# Altium PCB Mixed Signal Board Project.PcbDoc (part 3 of 3)
Units mm, origin at the board's own origin, x right, y up, seen from the top; angles counter-clockwise.
Board outline 70.1 x 70.99 mm, 4 copper layers (Top Layer, GND, VCC, Bottom Layer), stack 1.565 mm thick; 188 components, 143 nets, 738 pads, 465 vias.
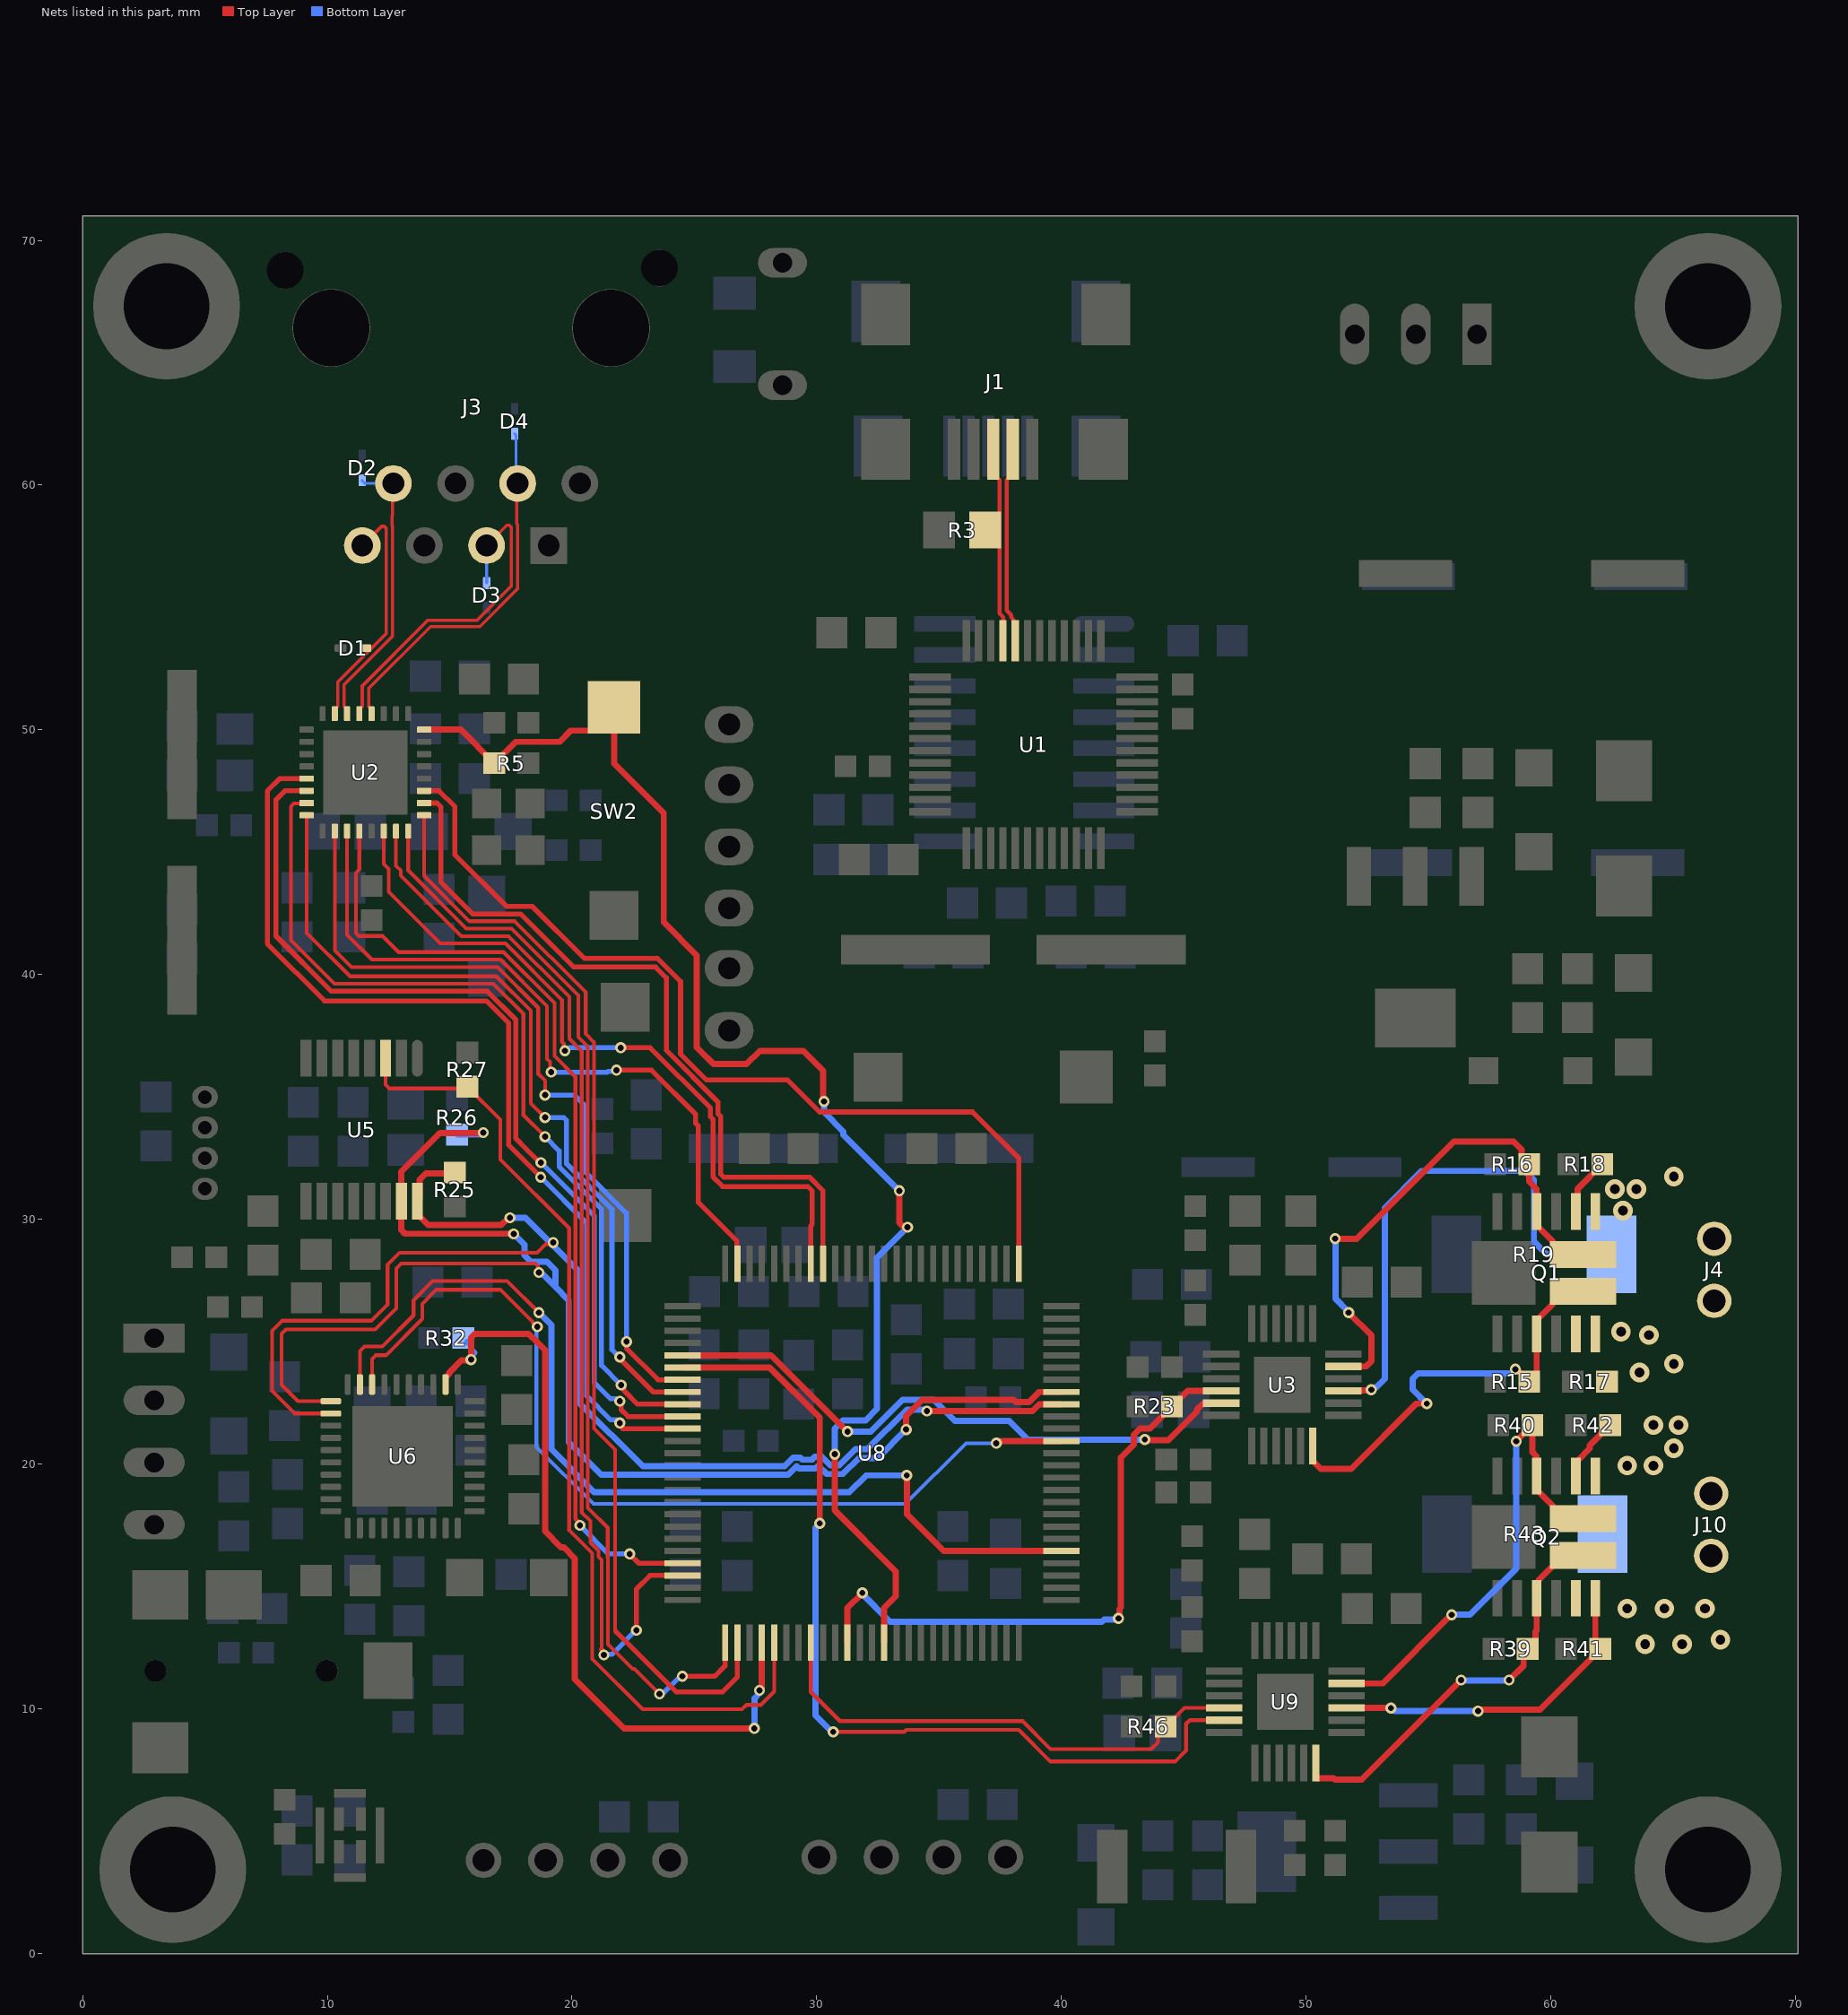
[diagram p5: the nets of this part, all layers, seen from the top]

## Via types
v1: diameter 0.8, hole 0.4, Top Layer to Bottom Layer, tented both sides, 287 vias
v2: diameter 0.45, hole 0.25, Top Layer to Bottom Layer, tented both sides, 178 vias

## Nets (pads, with @x,y where several pads share a name; then routed paths per layer and width w, separated by ;. In a path a pad name is that pad's centre, name@x,y a point inside that pad or via, vN(x,y) a via of type N, cw(c..) or ccw(c..) an arc to the next point about the centre after c; other vN are vias at no path point) (continued)
PHY_RESET: R5.1 SW2.2 U2.32 U8.64 | length 58.4
  Top Layer w0.254: U2.32@13.957,50.01 15.452,50.01 R5.1@16.821,48.641 17.69,49.51 19.487,49.51 19.947,49.97 20.769,49.97 SW2.2@21.717,50.918 21.717,48.616 23.749,46.584 23.749,42.139 25.1,40.788 25.1,37.022 25.248,36.873 25.781,36.341 27.133,36.341 27.675,36.882 29.448,36.882 30.258,36.072 v2@30.258,34.8 ; v2(30.734,20.404) 30.734,18.11 33.227,15.617 33.227,14.599 32.758,14.13 U8.64@32.758,12.709 ; v2(33.376,31.168) 33.376,29.87 v2@33.655,29.591
  Bottom Layer w0.254: v2(30.296,34.815) 30.296,34.382 31.09,33.588 31.09,33.454 v2(33.376,31.168) ; v2(30.734,20.404) 30.734,21.447 31.071,21.784 31.994,21.784 32.461,22.252 32.461,28.43 v2(33.709,29.679)
RD_N: D4.K J3.6 U2.4 | length 15.3
  Top Layer w0.132: U2.4@11.807,50.66 11.807,50.835 11.686,50.956 11.686,51.687 14.224,54.224 16.236,54.224 17.78,55.768 17.78,58.387 17.74,58.427 17.74,60.031 J3.6@17.78,60.071
  Bottom Layer w0.114: D4.K@17.653,62.103 17.716,62.039 17.716,60.134 J3.6@17.78,60.071
RD_P: D3.K J3.5 U2.5 | length 14.3
  Top Layer w0.132: U2.5@11.307,50.66 11.307,50.835 11.428,50.956 11.428,51.794 14.117,54.483 16.129,54.483 17.521,55.875 17.521,58.279 17.444,58.357 17.336,58.357 J3.5@16.51,57.531
  Bottom Layer w0.114: D3.K@16.51,56.001 J3.5@16.51,57.531
RESET: R27.1 U5.3 U8.55 | length 40.6
  Top Layer w0.152: U5.3@12.379,36.584 12.379,35.5 12.528,35.351 15.653,35.351 R27.1@15.723,35.42 17.071,34.072 17.071,32.447 19.885,29.633 19.885,17.297 20.826,16.356 20.826,12.04 22.887,9.979 26.946,9.979 27.125,10.158 27.709,10.158 28.258,10.707 U8.55@28.258,12.709
RESET_DAC: R32.1 U6.32 U8.54 | length 32.3
  Top Layer w0.254: U6.32@14.833,23.548 14.977,23.692 14.977,23.735 15.475,24.232 15.838,24.232 v2(15.875,24.27) 15.875,25.175 16.024,25.324 18.229,25.324 18.395,25.158 18.401,25.158 18.894,24.665 18.894,21.585 18.898,21.582 18.898,17.253 19.55,16.601 19.664,16.601 20.118,16.146 20.118,11.205 22.121,9.202 v2(27.45,9.202) ; v2(27.66,10.75) 27.758,10.848 U8.54@27.758,12.709
  Bottom Layer w0.254: R32.1@15.72,24.991 15.875,24.836 15.875,24.68 16.003,24.551 15.875,24.423 v2(15.875,24.27) ; v2(27.45,9.202) 27.45,10.432 27.66,10.642 v2(27.66,10.75)
RX_CLK: U2.19 U8.24 | length 29.9
  Top Layer w0.152: U2.19@10.807,45.86 10.807,41.629 11.822,40.614 17.081,40.614 18.922,38.772 18.922,38.77 18.979,38.714 18.979,36.553 19.099,36.433 19.099,36.064 v2(19.146,36.017)
  Top Layer w0.203: v2(21.812,36.097) 23.25,36.097 25.05,34.298 25.05,33.935 25.155,33.83 25.155,30.704 26.733,29.126 26.733,28.21 U8.24@26.758,28.185
  Bottom Layer w0.203: v2(19.146,36.017) 21.447,36.017 21.483,36.053 21.768,36.053 v2(21.812,36.097)
RX_D0: U2.16 U8.33 | length 34.7
  Top Layer w0.152: U2.16@9.157,46.51 9.157,41.703 10.931,39.929 16.908,39.929 18.316,38.521 18.316,35.813 18.318,35.812 18.318,34.743 v2@18.967,34.094
  Top Layer w0.203: v2(21.952,24.373) 21.952,24.318 23.323,22.947 U8.33@24.52,22.947
  Bottom Layer w0.203: v2(18.898,34.163) 19.658,34.163 19.777,34.044 19.777,32.271 21.632,30.416 21.632,24.674 21.933,24.373 v2(21.952,24.373)
RX_D1: U2.15 U8.34 | length 36.6
  Top Layer w0.152: U2.15@9.157,47.01 9.137,46.99 8.628,46.99 8.509,46.871 8.509,41.402 10.287,39.624 16.784,39.624 18.013,38.395 18.013,34.259 v2(18.898,33.374)
  Top Layer w0.203: v2(22.005,23.233) 22.117,23.121 22.117,23.013 22.684,22.447 U8.34@24.52,22.447
  Bottom Layer w0.203: v2(18.898,33.374) 19.472,32.8 19.472,32.145 21.206,30.411 21.206,24.032 v2(22.005,23.233)
RX_D2: U2.14 U8.35 | length 38.7
  Top Layer w0.203: U2.14@9.157,47.51 8.267,47.51 7.901,47.144 7.901,41.579 10.161,39.319 16.539,39.319 17.706,38.152 17.706,33.297 18.11,32.893 18.683,32.32 v2(18.73,32.32) ; v2(21.952,22.573) 21.999,22.526 21.999,22.276 22.003,22.273 22.003,22.233 22.288,21.947 U8.35@24.52,21.947
  Bottom Layer w0.203: v2(18.73,32.32) 20.901,30.149 20.901,23.334 21.561,22.674 21.815,22.674 21.916,22.573 v2(21.952,22.573)
RX_D3: U2.13 U8.36 | length 40.4
  Top Layer w0.203: U2.13@9.157,48.01 8.06,48.01 7.548,47.498 7.548,41.263 9.884,38.927 16.5,38.927 17.402,38.026 17.402,33.043 v2(18.72,31.725) ; v2(21.952,21.678) 21.952,21.611 22.071,21.492 22.071,21.447 U8.36@24.52,21.447
  Bottom Layer w0.203: v2(18.72,31.725) 20.596,29.848 20.596,23.208 20.599,23.205 20.599,22.784 21.577,21.806 21.822,21.806 v2@21.951,21.678
RX_DV: U2.18 U8.32 | length 33.1
  Top Layer w0.152: U2.18@10.307,45.86 10.307,40.984 10.982,40.309 16.957,40.309 18.619,38.647 18.619,35.941 18.898,35.663 v2(18.898,35.079)
  Top Layer w0.203: v2(22.225,25.003) 22.225,24.734 23.512,23.447 U8.32@24.52,23.447
  Bottom Layer w0.203: v2(18.898,35.079) 20.089,35.079 20.549,34.62 20.549,31.931 22.225,30.254 v2(22.225,25.003)
RX_ER: U2.20 U8.47 | length 40.1
  Top Layer w0.152: U2.20@11.307,45.86 11.307,44.297 11.165,44.155 11.165,41.699 11.285,41.58 12.251,41.58 12.913,40.919 17.205,40.919 19.283,38.84 19.283,36.679 20.139,35.824 20.139,17.763 20.323,17.579 v2(20.323,17.499)
  Top Layer w0.203: v2(22.353,16.329) 22.735,15.947 U8.47@24.52,15.947
  Bottom Layer w0.203: v2(20.323,17.499) 21.492,16.329 v2(22.353,16.329)
SCL: R25.1 U5.16 U6.2 U8.92 | length 57.7
  Top Layer w0.152: U6.2@10.146,22.07 8.664,22.07 7.747,22.987 7.747,25.449 8.16,25.862 11.805,25.862 12.46,26.517 12.46,28.135 12.954,28.629 18.577,28.629 18.943,28.995 19.171,28.995 v2(19.228,29.052)
  Top Layer w0.254: R25.1@15.304,31.877 14.033,31.877 13.777,31.621 13.777,30.832 U5.16@13.679,30.734 13.679,30.209 14.119,29.769 17.114,29.769 17.394,30.048 v2@17.424,30.048 ; v2(34.503,22.171) 38.817,22.171 39.093,22.447 U8.92@39.996,22.447
  Bottom Layer w0.254: v2(17.462,30.064) 18.096,30.064 v2@19.183,28.977 ; v2(19.228,29.052) 19.228,29.022 v2@19.183,28.977 ; v2(34.503,22.171) 34.449,22.225 33.68,22.225 32.06,20.605 31.576,20.605 30.922,19.95 30.546,19.95 30.203,20.294 29.908,20.294 29.795,20.181 29.419,20.181 29.333,20.267 29.039,20.267 28.69,19.918 22.89,19.918 20.266,22.542 20.266,27.894 v2@19.183,28.977
SCLK: U6.38 U8.89 | length 38.4
  Top Layer w0.152: U6.38@11.831,23.255 11.831,24.297 11.98,24.446 12.391,24.446 13.878,25.933 13.878,26.551 14.453,27.125 17.071,27.125 18.388,25.809 18.388,25.777 18.553,25.612 v2(18.583,25.612)
  Top Layer w0.254: v2(37.338,20.853) 37.391,20.853 37.485,20.947 U8.89@39.996,20.947
  Bottom Layer w0.152: v2(18.583,25.612) 18.543,25.572 18.543,20.709 20.881,18.372 33.618,18.372 36.1,20.853 v2(37.338,20.853)
SDA: R26.1 U5.15 U6.1 U8.93 | length 63
  Top Layer w0.152: U6.1@10.146,22.57 8.799,22.57 8.128,23.241 8.128,25.329 8.306,25.508 11.951,25.508 12.814,26.371 12.814,27.988 13.021,28.195 18.499,28.195 18.606,28.089 18.606,27.869 v2(18.644,27.832)
  Top Layer w0.254: v2@16.332,33.528 14.605,33.528 13.029,31.952 U5.15@13.029,30.734 13.029,29.562 13.178,29.413 17.604,29.413 v2(17.614,29.403) ; v2(33.655,21.412) 33.655,21.965 34.315,22.625 38.049,22.625 38.139,22.535 38.679,22.535 39.091,22.947 U8.93@39.996,22.947
  Bottom Layer w0.254: R26.1@15.304,33.465 16.238,33.465 16.317,33.543 v2(16.37,33.543) ; v2(17.614,29.403) 18.054,28.963 18.054,28.524 18.308,28.27 18.974,28.27 19.322,27.922 19.322,27.24 ; v2(18.644,27.832) 18.73,27.832 19.322,27.24 ; v2(33.655,21.412) 32.492,20.249 31.723,20.249 31.069,19.595 30.399,19.595 30.056,19.938 29.942,19.825 29.272,19.825 29.186,19.911 28.837,19.563 21.198,19.563 19.863,20.898 19.863,26.698 19.322,27.24
SDIN: U6.39 U8.80 | length 40.6
  Top Layer w0.152: U6.39@11.331,23.255 11.331,24.616 11.515,24.8 12.245,24.8 13.524,26.079 13.524,26.697 14.306,27.479 17.348,27.479 18.635,26.192 v2(18.644,26.192)
  Top Layer w0.254: v2(33.68,19.538) 33.68,17.958 35.191,16.447 U8.80@39.996,16.447
  Bottom Layer w0.254: v2(18.644,26.192) 19.152,25.684 19.152,20.604 20.904,18.851 31.332,18.851 32.018,19.538 v2(33.68,19.538)
SH1: J4.1 Q1.3 Q1.13 R15.2 U3.18 | length 17.8
  Top Layer w0.254: U3.18@50.272,20.737 50.272,20.137 50.597,19.812 51.848,19.812 54.506,22.47 v2(54.927,22.47) ; v2(58.547,23.876) 58.585,23.838 58.648,23.838 58.969,23.517 59.268,23.517 59.417,23.666 Q1.3@59.417,25.313 59.417,25.863 60.094,26.54 60.094,26.64 60.517,27.063 Q1.13@61.317,27.063
  Bottom Layer w0.254: v2(54.927,22.47) 54.356,23.041 54.356,23.484 54.572,23.7 58.371,23.7 v2(58.547,23.876)
SH1_2: J10.1 Q2.3 Q2.13 R39.2 U9.18 | length 17
  Top Layer w0.254: U9.18@50.399,7.783 50.399,7.183 50.422,7.16 51.133,7.16 51.181,7.112 52.269,7.112 54.336,9.179 v2(56.335,11.178) ; v2(58.293,11.176) 58.886,11.769 58.886,12.277 59.372,12.763 59.372,13.163 59.417,13.208 Q2.3@59.417,14.518 59.417,14.843 59.49,14.916 59.49,15.241 60.517,16.268 Q2.13@61.317,16.268
  Bottom Layer w0.254: v2(56.335,11.178) 56.386,11.178 56.414,11.15 58.267,11.15 v2(58.293,11.176)
SH2: J4.2 Q1.10 Q1.14 R16.1 U3.23 | length 22
  Top Layer w0.254: v2(51.181,29.21) 52.07,29.21 56.032,33.172 58.477,33.172 58.801,32.848 58.801,32.575 R16.1@59.118,32.258 59.118,31.541 59.417,31.242 Q1.10@59.417,30.313 59.417,29.763 60.094,29.086 60.094,28.986 60.517,28.563 Q1.14@61.317,28.563 ; U3.23@51.522,23.991 52.451,23.991 52.662,24.202 52.662,25.263 v2(51.737,26.187)
  Bottom Layer w0.254: v2(51.181,29.21) 51.199,29.192 51.199,26.757 51.737,26.218 v2(51.737,26.187)
SH2_2: J10.2 Q2.10 Q2.14 R40.1 U9.23 | length 20.2
  Top Layer w0.254: U9.23@51.649,11.037 53.118,11.037 55.924,13.843 v2(55.944,13.843) ; v2(58.585,20.933) 58.589,20.933 R40.1@59.245,21.59 59.245,20.492 59.417,20.32 Q2.10@59.417,19.518 59.417,18.968 60.094,18.291 60.094,18.191 60.517,17.768 Q2.14@61.317,17.768
  Bottom Layer w0.254: v2(55.944,13.843) 56.699,13.843 58.585,15.728 58.585,20.79 58.547,20.828 58.585,20.866 v2(58.585,20.933)
SNSOUT: R23.1 U3.10 U8.61 | length 25.4
  Top Layer w0.254: U8.61@31.258,12.709 31.258,14.13 v2(31.865,14.738) ; v2(42.329,13.692) 42.367,13.729 42.367,14.077 42.427,14.138 42.427,20.266 42.951,20.789 42.951,21.189 43.216,21.455 43.617,21.455 R23.1@44.513,22.352 45.152,22.991 U3.10@46.522,22.991
  Bottom Layer w0.254: v2@31.828,14.722 32.987,13.564 41.664,13.564 41.755,13.654 42.292,13.654 v2(42.329,13.692)
SNSOUT_2: R46.1 U8.58 U9.10 | length 20.8
  Top Layer w0.152: U8.58@29.758,12.709 29.758,10.689 30.947,9.5 38.41,9.5 39.553,8.357 43.663,8.357 43.942,8.636 43.942,8.954 R46.1@44.259,9.271 45.025,10.037 U9.10@46.649,10.037
SO: U3.11 U8.30 | length 25.2
  Top Layer w0.254: U8.30@24.52,24.447 28.143,24.447 v2@31.258,21.332 ; v2(43.404,21.002) 43.436,20.97 44.367,20.97 45.543,22.147 45.543,22.236 45.776,22.468 46.499,22.468 U3.11@46.522,22.491
  Bottom Layer w0.254: v2(31.259,21.331) 31.26,21.332 32.209,21.332 33.502,22.625 34.785,22.625 35.642,21.768 37.871,21.768 38.638,21.002 v2(43.404,21.002)
SO_2: U8.31 U9.11 | length 37.6
  Top Layer w0.152: v2(30.67,9.058) 33.572,9.058 33.66,9.146 38.258,9.146 39.555,7.849 44.638,7.849 45.093,8.303 45.093,9.388 45.241,9.537 U9.11@46.649,9.537
  Top Layer w0.254: U8.31@24.52,23.947 28.072,23.947 30.124,21.895 v2(30.124,17.577)
  Bottom Layer w0.254: v2(30.124,17.577) 29.945,17.398 29.945,9.73 v2@30.632,9.042
SP: Q1.5 Q1.6 Q1.7 Q1.8 R17.2 R18.2 R19.2 U3.21 | length 24.1
  Top Layer w0.254: U3.21@51.522,22.991 51.545,23.014 52.638,23.014 v2(52.662,23.037) ; Q1.8@61.017,30.313 61.09,30.386 61.09,31.245 R18.2@62.103,32.258
  Bottom Layer w0.254: v2(52.662,23.037) 52.713,23.037 52.813,23.137 52.87,23.137 53.213,23.48 53.213,30.475 54.717,31.979 58.927,31.979 59.309,31.596 59.309,29.083 59.817,28.575 R19.2@62.484,28.575
  other v1: 63.627,23.749 65.025,24.098 64.008,25.273 62.865,25.412 62.941,30.353 62.611,31.242 63.5,31.242 65.024,31.75
SP_2: Q2.5 Q2.6 Q2.7 Q2.8 R41.2 R42.2 R43.2 U9.21 | length 16.3
  Top Layer w0.254: U9.21@51.649,10.037 51.651,10.035 53.465,10.035 v2(53.467,10.033) ; v2(57.023,9.906) 57.079,9.962 59.552,9.962 62.016,12.426 R41.2@62.016,12.446 61.817,12.645 Q2.6@61.817,14.518 ; Q2.8@61.017,19.518 61.09,19.591 61.09,20.141 61.597,20.648 61.597,20.766 R42.2@62.421,21.59
  Bottom Layer w0.254: v2(53.467,10.033) 53.594,9.906 v2(57.023,9.906)
  other v1: 63.85,12.645 65.362,12.645 66.929,12.827 63.119,14.097 64.64,14.097 66.294,14.097 63.119,19.939 64.194,19.939 65.025,20.648 64.194,21.593 65.215,21.593
TD_N: D2.K J3.2 U2.6 | length 12
  Top Layer w0.132: U2.6@10.807,50.66 10.807,50.835 10.686,50.956 10.686,51.85 12.66,53.823 12.66,58.346 12.639,58.368 12.639,58.74 12.66,58.761 12.66,60.031 J3.2@12.7,60.071
  Bottom Layer w0.114: D2.K@11.43,60.201 11.43,60.164 11.523,60.071 12.446,60.071 12.7,59.817 J3.2@12.7,60.071
TD_P: D1.K J3.1 U2.7 | length 9.8
  Top Layer w0.132: U2.7@10.307,50.66 10.307,50.835 10.428,50.956 10.428,51.957 12.401,53.93 12.401,58.239 12.324,58.316 12.215,58.316 J3.1@11.43,57.531
TX_CLK: U2.22 U8.18 | length 30.8
  Top Layer w0.152: U2.22@12.307,45.86 12.307,44.52 12.504,44.323 12.504,43.376 14.609,41.271 17.281,41.271 19.587,38.965 19.587,37.256 19.663,37.179 19.663,36.937 v2(19.71,36.889)
  Top Layer w0.203: v2(21.986,37.013) 23.196,37.013 25.659,34.55 25.659,34.188 25.764,34.083 25.764,31.731 26.15,31.345 29.639,31.345 29.813,31.171 29.813,29.79 29.758,29.734 U8.18@29.758,28.185
  Bottom Layer w0.203: v2(19.71,36.889) 19.777,36.889 19.901,37.013 v2(21.986,37.013)
TX_D0: U2.24 U8.51 | length 44.7
  Top Layer w0.152: U2.24@13.307,45.86 13.307,44.253 15.683,41.877 17.533,41.877 20.257,39.153 20.257,37.447 20.647,37.058 20.647,18.211 21.457,17.402 21.457,16.262 21.458,16.261 21.458,16.189 21.461,16.186 21.461,12.647 21.511,12.598 22.481,11.628 22.554,11.628 v2(23.571,10.61)
  Top Layer w0.203: v2(24.511,11.328) 25.826,11.328 26.258,11.76 U8.51@26.258,12.709
  Bottom Layer w0.203: v2(23.571,10.61) 23.595,10.634 23.715,10.634 24.409,11.328 v2(24.511,11.328)
TX_D1: U2.25 U8.52 | length 45.3
  Top Layer w0.152: U2.25@13.957,46.51 13.957,44.034 15.811,42.18 17.66,42.18 20.562,39.279 20.562,37.574 20.901,37.235 20.901,21.449 21.761,20.588 21.761,13.189 21.814,13.137
  Top Layer w0.203: 21.814,13.137 24.255,10.695 26.152,10.695 26.758,11.301 U8.52@26.758,12.709
TX_D2: U2.26 U8.17 | length 31
  Top Layer w0.203: U2.26@13.957,47.01 14.486,47.01 14.646,46.85 14.646,43.774 15.936,42.484 17.895,42.484 20.067,40.312 23.411,40.312 23.851,39.872 23.851,36.909 25.964,34.795 25.964,34.314 26.069,34.209 26.069,31.857 26.201,31.725 29.702,31.725 30.258,31.168 U8.17@30.258,28.185
TX_D3: U2.27 U8.1 | length 37.7
  Top Layer w0.203: U2.27@13.957,47.51 14.562,47.51 15.215,46.857 15.215,44.893 17.319,42.788 18.376,42.788 20.497,40.667 23.487,40.667 24.435,39.719 24.435,36.756 25.485,35.706 28.8,35.706 30.118,34.387 36.369,34.387 38.258,32.499 U8.1@38.258,28.185
TX_EN: U2.23 U8.48 | length 43.9
  Top Layer w0.152: U2.23@12.807,45.86 12.807,44.451 13.002,44.256 13.002,44.049 15.478,41.574 17.407,41.574 19.891,39.089 19.891,37.382 20.393,36.88 20.393,18.034 20.751,17.676 20.751,16.791 21.08,16.461 21.08,16.208 21.207,16.081 21.207,12.425
  Top Layer w0.203: 21.207,12.425 21.255,12.378 21.255,12.25 v2(21.302,12.203) ; v2(22.631,13.208) 22.631,14.893 23.185,15.447 U8.48@24.52,15.447
  Bottom Layer w0.203: v2(21.302,12.203) 21.326,12.227 21.625,12.227 22.606,13.208 v2(22.631,13.208)
USBD_N: J1.2 U1.32 | length 8.2
  Top Layer w0.166: J1.2@38.011,61.468 37.854,61.468 37.854,60.311 37.757,60.214 37.757,54.879 37.945,54.691 37.945,54.598 38.045,54.498 38.045,53.708 U1.32@38.112,53.641
USBD_P: J1.3 R3.1 U1.33 | length 8.7
  Top Layer w0.166: R3.1@36.891,58.801 R3.1@37.465,58.801 ; J1.3@37.211,61.468 37.368,61.468 37.368,60.311 37.465,60.214 R3.1@37.465,58.801 ; U1.33@37.612,53.641 37.611,53.642 37.611,54.611 37.465,54.757 37.465,57.658 R3.1@37.465,58.801
pads on no net: J1.1 J1.4 J3. J3.3 J3.4 J3.7 J3.8 J5.1 J5.4 J7. J7.4 J12. MH2.1 MH3.1 U1.2 U1.3 U1.4 U1.10 U1.11 U1.12 U1.13 U1.14 U1.15 U1.16 U1.17 U1.19 U1.21 U1.22 U1.28 U1.29 U1.30 U1.31 U1.41 U1.42 U1.43 U1.45 U1.46 U2.30 U2.31 U4.7 U4.8 U4.9 U4.10 U4.11 U4.12 U4.13 U4.15 U5.6 U5.7 U5.8 U5.9 U6.20 U6.21 U6.22 U6.23 U6.24 U6.25 U6.26 U6.29 U6.30 U6.36 U8.2 U8.3 U8.4 U8.5 U8.7 U8.8 U8.9 U8.15 U8.38 U8.39 U8.40 U8.41 U8.42 U8.43 U8.44 U8.46 U8.67 U8.77 U8.81 U8.82 U8.83 U8.84 U8.85 U8.86 U8.87 U8.88 U8.91 U8.95 U8.96 U8.97 U8.98

## Polygon pours and split planes (outlines as drawn)
GND on Bottom Layer "GND_L04_P003" (solid, pour order 3): 15.315,53.848 19.431,53.848 19.431,45.085 15.24,45.085
GND on Bottom Layer "GND_L04_P009" (solid, remove dead copper, pour order 9): 29.845,47.371 29.972,47.498 32.258,47.498 32.766,46.99 32.766,41.783 29.845,41.783
GND on Bottom Layer "GND_L04_P065" (solid, pour order 65): 37.084,27.305 36.512,26.733 36.512,25.892 35.893,25.273 33.02,25.273 32.927,25.18 32.927,22.876 35.813,22.876 35.813,22.755 35.83,22.738 35.83,22.171 37.338,22.171 38.608,23.441 38.608,27.344
GND on Bottom Layer "GND_L04_P064" (solid, pour order 64): 24.511,23.647 24.663,23.495 31.699,23.495 32.131,23.063 32.131,22.447 31.131,21.447 29.146,21.447 28.778,21.079 28.778,20.404 25.4,20.404 24.511,21.293
EARTH on Bottom Layer "Bottom Layer-EARTH" (solid, remove dead copper, pour order 68): 0,62.255 3.683,62.23 8.687,62.23 15.189,68.732 25.705,68.732 25.705,67.259 25.806,67.158 29.845,67.158 30.15,67.462 30.15,68.732 31.979,68.732 32.004,68.707 61.443,68.707 61.976,68.174 61.976,64.922 63.83,63.068 70.079,63.068 70.129,63.119 70.129,70.968 70.104,70.993 0,70.993
GND on Bottom Layer "GND_L04_P063" (solid, pour order 63): 61.874,6.071 62.103,6.299 62.103,8.001 61.671,8.433 52.934,8.433 52.934,8.407 52.349,7.823 52.349,6.096 52.913,5.532 54.674,5.532 55.11,5.969 56.642,5.969
+3V3 on Bottom Layer "+3V3_L04_P060" (solid, remove dead copper, pour order 60): 7.976,5.055 8.026,5.055 8.585,4.496 13.919,4.496 13.919,7.341 13.868,7.29 7.976,7.29
GND on Bottom Layer "GND_L04_P062" (solid, remove dead copper, pour order 62): 11.657,4.496 8.026,4.496 8.001,4.47 8.001,2.362 8.255,2.108 11.532,2.108 11.657,2.234
GND on Bottom Layer "GND_L04_P061" (solid, pour order 61): 12.192,35.331 12.319,35.204 12.319,33.782 12.287,33.75 8.579,33.75 8.357,33.972 8.357,35.56 11.899,35.56
NetC58_1 on Bottom Layer "NETC58_1_L04_P056" (solid, pour order 56): 24.765,33.528 31.496,33.528 31.496,32.131 24.765,32.131
NetC67_2 on Bottom Layer "NETC67_2_L04_P055" (solid, remove dead copper, pour order 55): 28.067,24.384 28.067,26.289 30.226,26.289 30.48,26.035 30.48,24.511 30.734,24.257 32.131,24.257 32.131,26.162 30.353,27.94 29.718,27.94 29.464,28.194 28.448,28.194 28.448,28.321 28.575,28.448 28.575,30.607 28.448,30.607 28.321,30.734 26.606,30.734 26.606,24.384
+1V8 on Bottom Layer "+1V8_L04_P051" (solid, pour order 51): 55.626,5.096 54.753,5.969 47.244,5.969 47.117,5.842 47.117,3.556 38.735,3.556 38.735,0.508 40.894,0.508 47.371,0.508 50.292,3.429 55.626,3.429
NetC90_2 on Bottom Layer "NETC90_2_L04_P049" (solid, pour order 49): 52.832,2.667 52.959,2.54 55.626,2.54 55.88,2.794 55.88,5.715 56.007,5.842 60.706,5.842 60.706,5.715 62.103,4.318 62.103,2.921 60.325,1.143 52.705,1.143
GND on Bottom Layer "GND_L04_P047" (solid, pour order 47): 56.769,15.728 56.769,19.177 57.277,19.685 57.277,21.844 57.15,21.844 56.832,22.162 55.547,22.162 53.086,19.7 53.086,15.748
GND on Bottom Layer "GND_L04_P046" (solid, pour order 46): 57.15,27.051 57.277,27.178 57.277,31.242 54.927,31.242 53.909,30.224 53.909,26.889 53.944,26.924 57.15,26.924
GND on Bottom Layer "GND_L04_P045" (solid, pour order 45): 47.879,32.516 44.45,32.516 43.053,31.119 43.053,30.226 43.18,30.099 46.403,30.099 46.522,30.218 46.522,31.369 47.879,31.369
+12V on Bottom Layer "+12V_L04_P043" (solid, pour order 43): 53.975,32.848 53.893,32.766 49.022,32.766 48.772,32.516 48.772,29.786 48.967,29.591 50.546,29.591 50.8,29.845 50.8,31.242 50.927,31.242 51.181,31.496 53.975,31.496
SP_2 on Bottom Layer "SP_2_L04_P040" (solid, remove dead copper, pour order 40): 62.738,22.352 62.484,22.098 62.484,18.796 62.357,18.669 61.087,18.669 61.087,15.494 62.738,13.843 62.738,12.319 63.246,11.811 67.437,11.811 67.564,11.938 67.564,14.859 65.405,14.859 65.405,22.352
GND on Bottom Layer "GND_L04_P033" (solid, pour order 33): 13.104,18.006 13.202,17.907 16.764,17.907 16.764,21.717 16.637,21.844 13.081,21.844
+1V8 on Bottom Layer "+1V8_L04_P035" (solid, pour order 35): 16.701,23.505 16.635,23.57 10.541,23.57 10.541,21.844 10.668,21.844 16.637,21.844
+3V3 on Bottom Layer "+3V3_L04_P034" (solid, remove dead copper, pour order 34): 14.859,27.686 15.621,26.924 15.621,25.527 15.367,25.273 14.566,25.273 14.566,24.388 14.308,24.13 13.208,24.13 13.208,27.686
GND on Bottom Layer "GND_L04_P031" (solid, remove dead copper, pour order 31): 19.431,16.256 19.558,16.256 16.764,16.234 16.764,14.097 14.331,14.097 14.351,14.077 14.351,13.081 19.431,13.081
+3V3 on Bottom Layer "+3V3_L04_P030" (solid, pour order 30): 4.842,22.606 8.89,22.606 8.89,20.828 8.636,20.574 6.985,20.574 6.858,20.447 6.858,18.288 4.81,18.288
NetC36_2 on Bottom Layer "NETC36_2_L04_P029" (solid, pour order 29): 12.831,21.336 12.831,16.361 14.331,16.361 14.331,14.732 14.256,14.657 10.559,14.657 10.541,14.675 10.541,21.336
+3V3 on Bottom Layer "+3V3_L04_P027" (solid, pour order 27): 11.557,29.972 11.557,31.514 10.94,32.131 10.287,32.131 10.287,33.528 13.97,33.528 13.97,32.258 13.843,32.131 12.446,32.131 11.938,31.623 11.938,29.972
SP on Bottom Layer "SP_L04_P025" (solid, remove dead copper, pour order 25): 62.103,31.75 62.103,22.733 65.278,22.733 65.532,22.987 65.532,31.75
GND on Bottom Layer "GND_L04_P019" (solid, pour order 19): 55.88,45.085 50.8,45.085 50.8,39.497 50.99,39.306 52.705,39.306 52.959,39.56 52.959,43.307 53.086,43.434 55.88,43.434
+12V on Bottom Layer "+12V_L04_P017" (solid, pour order 17): 61.595,45.212 67.056,45.212 67.31,44.958 67.31,41.783 67.183,41.656 61.595,41.656
GND on Bottom Layer "GND_L04_P014" (solid, pour order 14): 56.134,57.023 51.181,57.023 51.181,53.34 56.134,53.34
+12V on Bottom Layer "+12V_L04_P012" (solid, pour order 12): 61.341,60.071 61.341,55.245 61.595,54.991 66.04,54.991 66.04,60.071
+3V3 on Bottom Layer "+3V3_L04_P005" (solid, pour order 5): 37.338,47.498 40.64,47.498 40.64,42.164 40.513,42.291 37.338,42.291
+3V3 on Bottom Layer "+3V3_L04_P008" (solid, remove dead copper, pour order 8): 32.004,55.753 35.687,55.753 36.195,55.245 36.195,52.71 36.19,52.705 32.004,52.705
GND on Bottom Layer "GND_L04_P004" (solid, pour order 4): 18.034,42.545 4.572,42.545 4.572,37.973 18.034,37.973
+3V3 on Bottom Layer "+3V3_L04_P002" (solid, remove dead copper, pour order 2): 17.275,44.196 10.541,44.196 10.541,46.736 7.239,46.736 4.826,44.323 4.826,42.545 17.269,42.545
NetC11_2 on Bottom Layer "NETC11_2_L04_P001" (solid, remove dead copper, pour order 1): 16.002,53.848 14.351,53.848 13.335,52.832 13.335,51.435 14.605,51.435 14.605,53.086 16.008,53.086
+12V on Top Layer "+12V_L01_P070" (solid, pour order 70): 56.058,67.589 60.401,67.589 60.909,67.081 60.909,63.043 60.858,62.992 56.007,62.992
GND on Top Layer "GND_L01_P032" (solid, remove dead copper, pour order 32): 19.431,16.256 19.558,16.256 16.764,16.234 16.764,14.097 14.331,14.097 14.351,14.077 14.351,13.081 19.431,13.081
NetC67_2 on Top Layer "NETC67_2_L01_P054" (solid, pour order 54): 28.321,27.432 28.702,27.813 28.702,30.607 26.924,30.607 26.924,29.337 27.051,29.21 27.559,29.21 27.686,29.083 27.686,27.432
NetC21_2 on Top Layer "NETC21_2_L01_P069" (solid, pour order 69): 7.645,67.666 7.62,67.691 7.62,70.891 7.747,70.764 19.761,70.764 19.787,70.739 24.613,70.739 24.867,70.485 24.867,66.472 25.654,65.684 29.032,65.684 29.642,65.075 29.642,63.551 29.235,63.144 26.035,63.144 22.123,67.056 7.62,67.056
+3V3 on Top Layer "+3V3_L01_P059" (solid, remove dead copper, pour order 59): 7.823,6.96 8.89,8.026 13.03,8.026 13.792,7.264 13.767,7.239 13.767,4.445 12.751,4.445 12.751,6.833 12.04,7.544 10.846,7.544 10.008,6.706 10.008,6.287 10.922,6.287 10.922,4.89 10.909,4.902 10.109,4.902 10.058,4.953 10.058,5.867 9.982,5.791 7.823,5.791
NetC56_1 on Top Layer "NETC56_1_L01_P058" (solid, remove dead copper, pour order 58): 32.741,33.528 34.011,33.528 34.011,32.131 32.741,32.131
NetC58_1 on Top Layer "NETC58_1_L01_P057" (solid, remove dead copper, pour order 57): 30.226,33.528 31.496,33.528 31.496,32.131 30.226,32.131
+1V8 on Top Layer "+1V8_L01_P052" (solid, pour order 52): 42.672,5.207 42.672,0.381 42.545,0.508 38.862,0.508 38.608,0.762 38.608,3.556 41.275,3.556 41.148,3.683 41.148,5.207
NetC90_2 on Top Layer "NETC90_2_L01_P050" (solid, pour order 50): 61.087,4.826 60.96,4.953 56.642,4.953 56.388,4.699 56.388,1.143 61.087,1.143
+12V on Top Layer "+12V_L01_P048" (solid, pour order 48): 58.801,9.652 58.928,9.779 65.024,9.779 65.024,7.493 64.643,7.112 58.674,7.112
+12V on Top Layer "+12V_L01_P044" (solid, pour order 44): 59.245,18.291 59.009,18.528 51.219,18.528 51.219,15.494 51.435,15.494 51.562,15.621 59.245,15.621
+12V on Top Layer "+12V_L01_P042" (solid, pour order 42): 53.975,32.848 53.893,32.766 49.022,32.766 48.772,32.516 48.772,29.786 48.967,29.591 50.546,29.591 50.8,29.845 50.8,31.242 50.927,31.242 51.181,31.496 53.975,31.496
+12V on Top Layer "+12V_L01_P041" (solid, remove dead copper, pour order 41): 51.219,18.528 51.219,14.097 50.711,13.589 50.292,13.589 50.292,11.938 50.419,12.065 52.451,12.065 53.465,13.079 53.465,18.55
SP_2 on Top Layer "SP_2_L01_P039" (solid, remove dead copper, pour order 39): 61.017,15.241 61.053,15.205 63.119,15.205 63.408,14.916 66.548,14.916 67.606,13.858 67.606,12.319 67.748,12.319 67.24,11.811 63.119,11.811 62.738,12.192 62.738,13.462 60.96,13.462
SP_2 on Top Layer "SP_2_L01_P038" (solid, remove dead copper, pour order 38): 60.897,20.492 63.119,20.492 63.5,20.873 63.5,21.971 63.627,21.971 64.008,22.352 65.405,22.352 66.164,21.593 66.164,20.766 64.194,18.796 60.717,18.796
SH1_2 on Top Layer "SH1_2_L01_P037" (solid, remove dead copper, pour order 37): 60.071,16.764 62.738,16.764 63.119,17.145 67.606,17.145 68.326,16.425 68.326,15.494 67.748,14.916 60.094,14.916
SH2_2 on Top Layer "SH2_2_L01_P036" (solid, remove dead copper, pour order 36): 60.094,18.796 64.64,18.796 66.164,20.32 67.564,20.32 68.326,19.558 68.326,18.288 67.606,17.568 60.094,17.568
+3V3 on Top Layer "+3V3_L01_P028" (solid, pour order 28): 11.557,29.972 11.557,31.514 10.94,32.131 10.287,32.131 10.287,33.528 13.97,33.528 13.97,32.258 13.843,32.131 12.446,32.131 11.938,31.623 11.938,29.972
GND on Top Layer "GND_L01_P026" (solid, remove dead copper, pour order 26): 10.429,35.477 12.379,35.5 12.379,33.782 10.429,33.782
SP on Top Layer "SP_L01_P024" (solid, remove dead copper, pour order 24): 60.706,26.187 60.745,26.226 63.881,26.226 65.659,24.447 65.659,23.749 64.77,22.86 61.817,22.86 61.817,24.638 60.706,24.638
SP on Top Layer "SP_L01_P023" (solid, remove dead copper, pour order 23): 60.706,30.988 62.484,32.766 65.659,32.766 65.659,29.21 61.017,29.21 60.986,29.179 60.706,29.179
+12V on Top Layer "+12V_L01_P022" (solid, remove dead copper, pour order 22): 58.42,30.988 58.42,29.21 58.358,29.148 56.961,29.148 53.594,25.781 53.594,24.257 56.261,24.257 56.261,26.54 58.067,26.54 58.42,26.187 58.42,24.638 58.801,24.638 58.801,30.988
SH1 on Top Layer "SH1_L01_P021" (solid, remove dead copper, pour order 21): 60.094,27.559 67.691,27.559 68.072,27.178 68.072,25.273 65.659,25.273 64.392,26.54 60.094,26.54
SH2 on Top Layer "SH2_L01_P020" (solid, remove dead copper, pour order 20): 60.094,29.086 60.218,29.21 62.611,29.21 64.389,30.988 67.691,30.988 68.072,30.607 68.072,28.448 67.691,28.067 60.071,28.067
+3V3 on Top Layer "+3V3_L01_P018" (solid, remove dead copper, pour order 18): 53.34,45.085 55.499,45.085 55.499,39.497 55.88,39.116 61.214,39.116 61.214,38.989 61.976,38.989 63.246,37.719 64.135,37.719 64.262,37.592 64.262,33.274 60.579,33.274 60.579,36.639 62.23,36.639 62.23,37.465 53.34,37.465
+12V on Top Layer "+12V_L01_P016" (solid, pour order 16): 61.595,45.212 67.056,45.212 67.31,44.958 67.31,41.783 67.183,41.656 61.595,41.656
NetC84_2 on Top Layer "NETC84_2_L01_P015" (solid, pour order 15): 64.135,49.657 64.008,49.784 52.451,49.784 51.435,48.768 51.435,42.672 52.705,42.672 52.705,47.879 64.135,47.879
GND on Top Layer "GND_L01_P013" (solid, pour order 13): 56.134,57.023 51.181,57.023 51.181,53.34 56.134,53.34
+12V on Top Layer "+12V_L01_P011" (solid, pour order 11): 61.341,60.071 61.341,55.245 61.595,54.991 66.04,54.991 66.04,60.071
GND on Top Layer "GND_L01_P010" (solid, remove dead copper, pour order 10): 29.845,47.371 29.972,47.498 32.258,47.498 32.766,46.99 32.766,41.783 29.845,41.783
+3V3 on Top Layer "+3V3_L01_P007" (solid, remove dead copper, pour order 7): 32.004,55.753 35.687,55.753 36.195,55.245 36.195,52.71 36.19,52.705 32.004,52.705
+3V3 on Top Layer "+3V3_L01_P006" (solid, remove dead copper, pour order 6): 40.259,44.323 40.259,47.153 40.041,47.371 37.338,47.371 37.338,46.228 37.465,46.101 39.751,46.101 39.878,45.974 39.878,44.323
NetC11_2 on Top Layer "NETC11_2_L01_P000" (solid, remove dead copper, pour order 0): 12.065,50.292 12.065,51.689 13.589,53.213 13.614,53.213 14.224,53.823 16.015,53.823 16.015,53.213 14.605,53.213 14.605,51.687 12.754,51.687 12.66,51.592 12.66,50.292
GND on GND (split plane): 69.594,70.483 69.594,0.51 0.51,0.51 0.51,6.92 13.462,6.92 13.512,6.926 13.539,6.938 13.558,6.946 13.598,6.976 16.138,9.516 16.168,9.556 16.176,9.575 16.188,9.602 16.194,9.652 16.194,12.889 18.034,12.889 18.084,12.895 18.13,12.915 18.17,12.945 18.2,12.985 18.22,13.031 18.226,13.081 18.226,26.416 18.22,26.466 18.2,26.512 18.17,26.552 18.13,26.582 18.084,26.602 18.034,26.608 14.732,26.608 14.682,26.602 14.636,26.582 14.596,26.552 14.566,26.512 14.546,26.466 14.54,26.416 14.546,26.366 14.566,26.32 14.596,26.28 14.636,26.25 14.682,26.23 14.732,26.224 17.842,26.224 17.842,13.273 16.002,13.273 15.952,13.267 15.906,13.247 15.866,13.217 15.836,13.177 15.816,13.131 15.81,13.081 15.81,9.732 13.382,7.304 0.51,7.304 0.51,28.891 9.168,28.891 9.175,28.886 9.221,28.866 9.271,28.86 9.321,28.866 9.367,28.886 9.407,28.916 9.437,28.956 9.457,29.002 9.463,29.052 9.463,29.083 9.457,29.133 9.437,29.179 9.407,29.219 9.367,29.249 9.321,29.269 9.271,29.275 0.51,29.275 0.51,37.781 17.827,37.781 17.842,37.766 17.842,30.052 16.938,29.148 14.732,29.148 14.682,29.142 14.636,29.122 14.596,29.092 14.566,29.052 14.546,29.006 14.54,28.956 14.546,28.906 14.566,28.86 14.596,28.82 14.636,28.79 14.682,28.77 14.732,28.764 17.018,28.764 17.068,28.77 17.095,28.782 17.114,28.79 17.154,28.82 18.17,29.836 18.2,29.876 18.22,29.922 18.226,29.972 18.226,37.846 18.22,37.896 18.2,37.942 18.17,37.982 18.043,38.109 18.003,38.139 17.984,38.147 17.957,38.159 17.907,38.165 0.51,38.165 0.51,70.483
+1V8 on VCC (split plane): 17.842,23.368 17.848,23.318 17.868,23.272 17.898,23.232 17.938,23.202 17.961,23.192 17.961,13.273 15.875,13.273 15.825,13.267 15.779,13.247 15.739,13.217 15.709,13.177 15.689,13.131 15.683,13.081 15.683,9.779 15.689,9.729 15.701,9.702 15.709,9.683 15.731,9.653 13.382,7.304 10.287,7.304 10.237,7.298 10.191,7.278 10.151,7.248 10.015,7.112 9.985,7.072 9.966,7.026 9.959,6.976 9.959,3.311 9.966,3.261 9.985,3.215 10.015,3.175 10.532,2.658 10.572,2.628 10.618,2.608 10.668,2.602 37.973,2.602 38.023,2.608 38.05,2.62 38.069,2.628 38.109,2.658 41.238,5.787 42.456,5.787 42.456,0.51 0.51,0.51 0.51,9.333 12.7,9.333 12.75,9.339 12.777,9.351 12.796,9.359 12.836,9.389 13.217,9.77 13.247,9.81 13.255,9.829 13.267,9.856 13.273,9.906 13.273,15.556 14.732,15.556 14.782,15.562 14.828,15.582 14.868,15.612 14.898,15.652 14.918,15.698 14.924,15.748 14.924,21.209 14.918,21.259 14.898,21.305 14.868,21.345 14.828,21.375 14.782,21.395 14.732,21.401 11.046,21.401 11.046,24.413 11.206,24.573 17.842,24.573
EARTH on VCC (split plane): 69.594,70.483 69.594,63.393 64.515,63.393 64.49,63.423 62.326,65.588 62.326,67.996 62.316,68.094 62.288,68.188 62.241,68.275 62.179,68.351 61.544,68.986 61.468,69.049 61.381,69.095 61.287,69.124 61.189,69.133 57.404,69.133 57.306,69.124 57.212,69.095 57.188,69.082 50.622,69.082 50.524,69.073 50.43,69.044 50.343,68.998 50.267,68.935 46.985,65.653 42.423,65.653 42.341,65.735 42.265,65.797 42.178,65.844 42.084,65.872 41.986,65.882 32.868,65.882 32.77,65.872 32.675,65.844 32.588,65.797 32.512,65.735 31.034,64.256 21.214,64.256 21.107,64.363 21.031,64.426 20.944,64.472 20.85,64.501 20.752,64.51 8.941,64.51 8.843,64.501 8.749,64.472 8.662,64.426 8.586,64.363 7.386,63.164 0.559,63.164 0.51,63.159 0.51,70.483
+12V on VCC (split plane): 61.321,67.788 61.321,65.38 61.331,65.282 61.359,65.187 61.406,65.1 61.468,65.024 63.641,62.851 63.642,62.843 63.671,62.749 63.717,62.662 63.78,62.586 63.831,62.535 63.907,62.473 63.994,62.426 64.088,62.398 64.186,62.388 69.594,62.388 69.594,0.51 52.453,0.51 52.453,4.572 52.445,4.647 52.424,4.719 52.388,4.785 52.341,4.843 50.752,6.432 50.694,6.479 50.627,6.515 50.556,6.537 50.481,6.544 48.389,6.544 48.389,33.272 54.197,33.272 55.482,31.987 55.54,31.94 55.606,31.904 55.678,31.883 55.753,31.875 64.897,31.875 64.972,31.883 65.044,31.904 65.11,31.94 65.168,31.987 65.215,32.045 65.251,32.111 65.272,32.183 65.28,32.258 65.28,39.878 65.272,39.953 65.251,40.025 65.215,40.091 65.168,40.149 65.11,40.196 65.044,40.232 64.972,40.253 64.897,40.261 60.454,40.261 60.454,56.896 60.446,56.971 60.425,57.043 60.389,57.109 60.342,57.167 58.564,58.945 58.506,58.992 58.44,59.028 58.368,59.049 58.293,59.057 54.261,59.057 49.024,64.294 49.024,66.271 50.83,68.078 57.353,68.078 57.451,68.087 57.545,68.116 57.569,68.128 60.98,68.128
+3V3 on VCC (split plane): 252 vertices, not listed, extent 0.51,0.51 64.514,65.505

## Keep-outs
Keep-Out Layer:
  the board outline again, w0.127

## Other copper
Top Layer:
  rectangle net GND: 40.259,60.198 44.831,62.865
  rectangle net GND: 40.259,65.659 44.831,68.58
  rectangle net GND: 29.591,60.198 33.909,62.865
  rectangle net GND: 31.242,65.405 35.611,68.58
  rectangle net GND: 28.575,52.832 31.088,54.864
Bottom Layer:
  region net GND: 44.831,62.865 40.259,62.865 40.259,60.198 44.831,60.198
  region net GND: 44.831,68.58 40.259,68.58 40.259,65.659 44.831,65.659
  rectangle net GND: 29.591,60.198 33.909,62.865
  rectangle net GND: 31.242,65.405 35.611,68.58
  rectangle net GND: 28.575,52.832 31.088,54.864
  region net EARTH: 54.915,64.999 54.915,70.409 54.026,70.409 54.026,64.414 54.915,64.414
  region net NetC21_2: 29.54,65.761 29.515,65.786 25.578,65.786 25.476,65.684 25.476,63.297 25.578,63.297 25.654,63.221 29.82,63.221 29.845,63.246 29.845,65.786
GND (plane layer: these items are gaps in the copper):
  lines w0.381: 0,6.985 0,7.112 6.477,7.112 12.192,7.112 13.462,7.112 16.002,9.652 16.002,13.081 18.034,13.081 18.034,26.416 14.732,26.416 ; 0,29.083 9.271,29.083 9.271,29.052 ; 0,37.973 17.907,37.973 18.034,37.846 18.034,29.972 17.018,28.956 14.732,28.956
VCC (plane layer: these items are gaps in the copper):
  lines w0.254: 0,53.975 0,53.848 0.127,53.975
  lines w0.36: 41.148,5.969 42.637,5.969 42.637,0.092 42.545,0
  lines w0.381: 0,9.525 12.7,9.525 13.081,9.906 13.081,15.748 14.732,15.748 14.732,21.209 10.953,21.209 10.854,21.308 10.854,24.492 11.126,24.765 18.034,24.765 18.034,23.368 ; 0,37.973 18.034,37.973 18.034,29.845 17.145,28.956 14.732,28.956 ; 0.127,29.083 9.144,29.083 9.144,29.052 ; 14.831,26.416 18.153,26.416 18.153,13.081 15.875,13.081 15.875,9.779 16.002,9.652 13.462,7.112 10.287,7.112 10.151,6.976 10.151,3.311 10.668,2.794 28.829,2.794 37.973,2.794 41.148,5.969 ; 47.623,6.683 47.623,6.729
  lines w0.762: 48.641,66.599 48.641,64.135 54.102,58.674 58.293,58.674 60.071,56.896 60.071,39.878 64.897,39.878 64.897,32.258 55.753,32.258 54.356,33.655 48.006,33.655 48.006,6.161 50.481,6.161 52.07,4.572 52.07,0.01
  lines w1: 0,62.001 0,62.103 0.559,62.662 7.595,62.662 8.941,64.008 14.478,64.008 20.752,64.008 21.006,63.754 31.242,63.754 32.868,65.38 41.986,65.38 42.215,65.151 47.193,65.151 50.622,68.58 57.353,68.58 57.404,68.631 61.189,68.631 61.824,67.996 61.824,65.38 64.135,63.068 64.135,62.941 64.186,62.89 70.18,62.89

## Silkscreen, mask and mechanical layers (free items; w line width, h text height)
Top Overlay:
  lines w0.254: 0,38 14,38 18,38 18,24 18,13 13.614,13 13.614,0

## Text inside footprints (layer, text, board x,y; h text height)
D5: Top Overlay "A" at 60.867,42.224 h0.89 r90; Top Overlay "K" at 60.992,49.349 h0.89 r90
D6: Top Overlay "K" at 61.107,36.924 h0.89; Top Overlay "A" at 56.794,36.991 h0.89
D7: Top Overlay "A" at 62.069,9.846 h0.89 r270; Top Overlay "K" at 61.944,2.721 h0.89 r270
DS1: Top Overlay "K" at 20.124,45.335 h0.56 r180; Top Overlay "A" at 15.412,45.26 h0.51 r180
DS2: Top Overlay "K" at 20.124,47.24 h0.56 r180; Top Overlay "A" at 15.412,47.165 h0.51 r180
U4: Bottom Overlay "16" at 35.331,54.966 h0.89; Bottom Overlay "9" at 34.603,44.002 h0.89; Bottom Overlay "8" at 42.497,43.879 h0.89; Bottom Overlay "1" at 42.57,54.839 h0.89
U5: Top Overlay "1" at 13.417,37.828 h0.64 r270; Top Overlay "16" at 13.438,29.739 h0.64 r270; Top Overlay "9" at 8.845,29.573 h0.64 r270; Top Overlay "8" at 8.84,38.045 h0.64 r270